# EAGLE board usb_tester-2.00 (EAGLE 6.3)
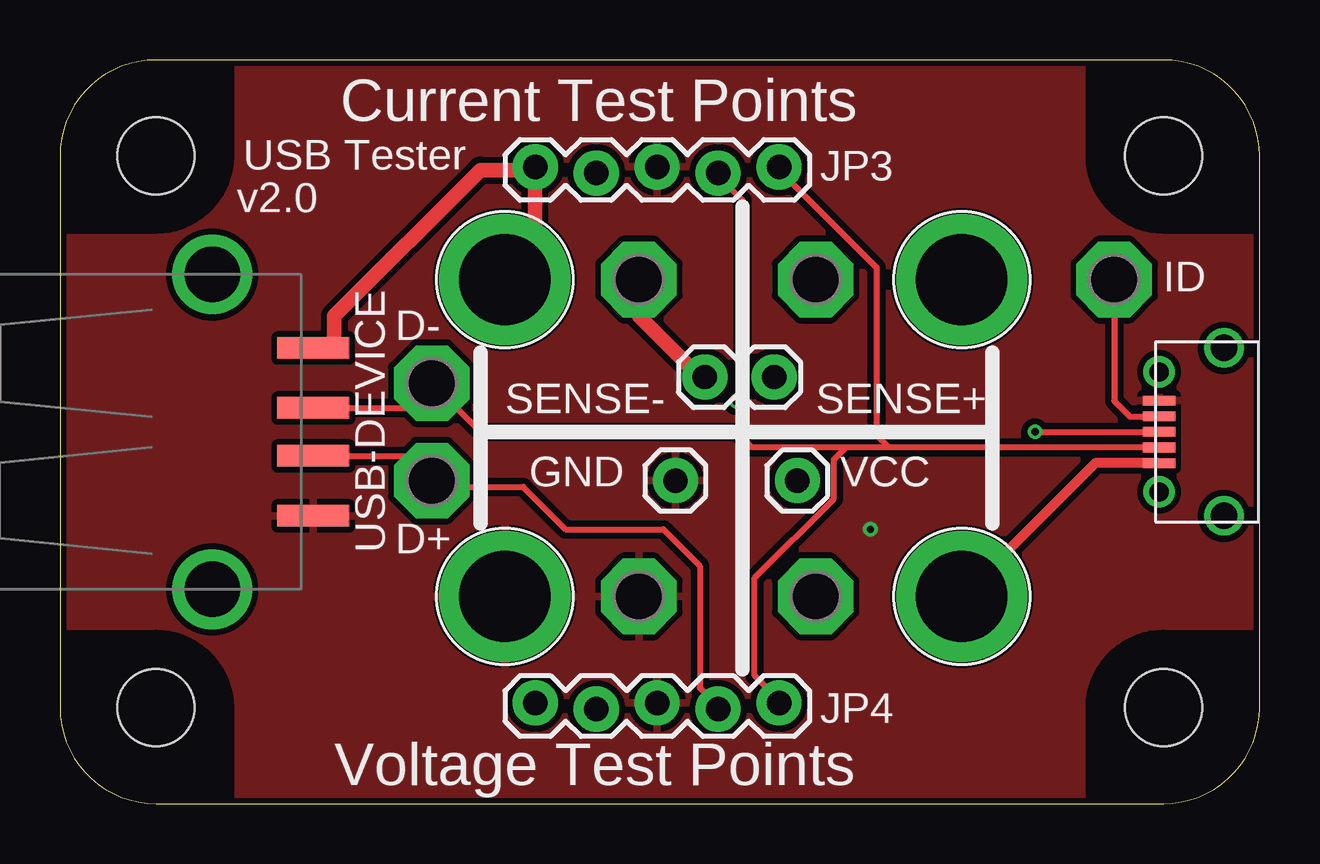
[diagram p0: board, top side]
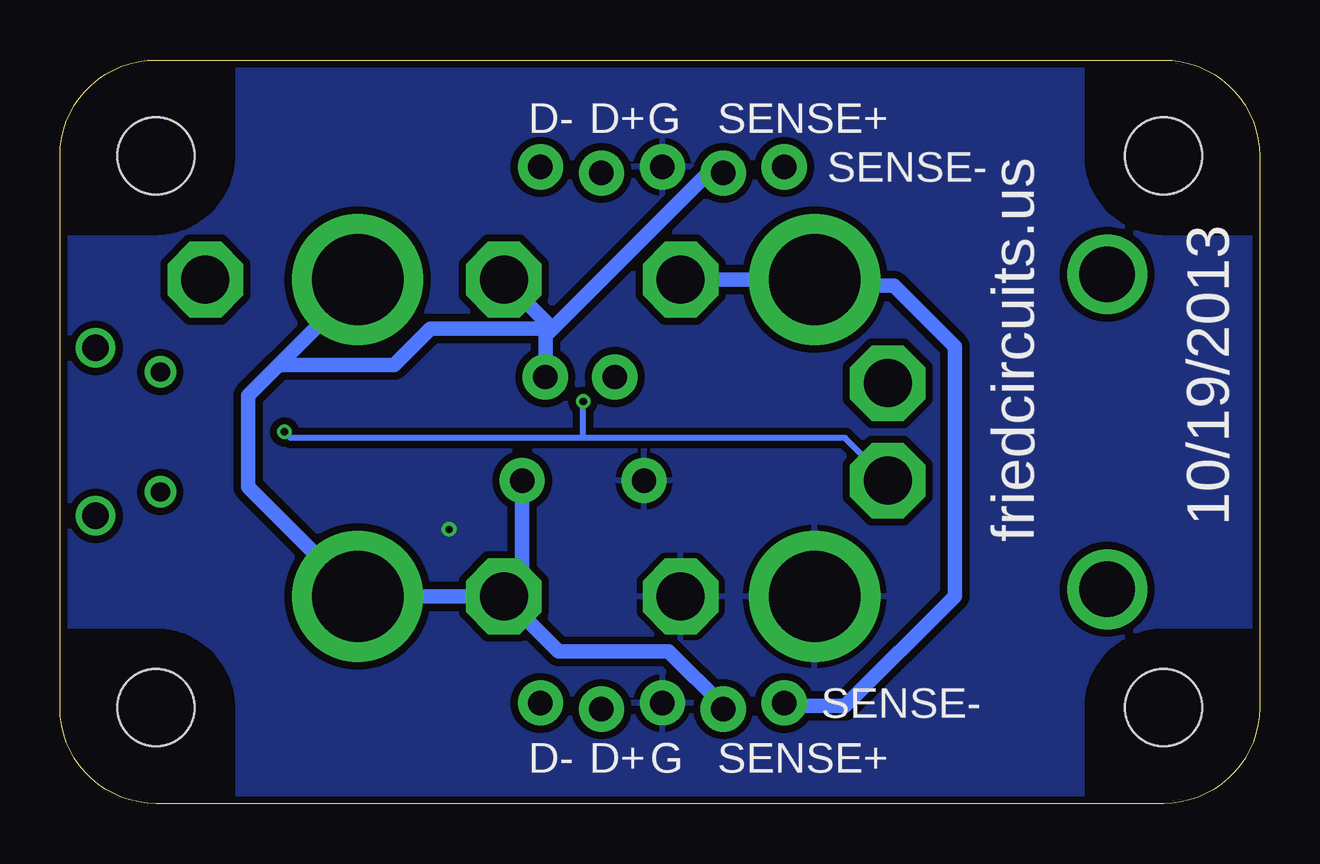
[diagram p1: board, bottom side, seen from below]

Size 50 x 31 mm. Coordinates in mm from the lower left corner, seen from the top.
Copper layers (1*16): Top 0.035mm / dielectric 1.5mm / Bottom 0.035mm
Design rules "Fusion_eagle_rule_v1.1": minimum track width 6mil, minimum drill 12mil, track to track 6mil, track to pad 6mil, pad to pad 6mil, via to via 6mil, smd to smd 0mil, copper to edge 10mil, drill to drill 10mil, minimum pad ring 10mil, minimum via ring 6mil, stop-mask expansion 2mil, vias tented up to drill 100mil, thermal gap 10mil
Net classes: 0 default: width 0.254 mm, drill 0.254 mm; 1 VBUS: width 0.61 mm, drill 0.254 mm; 2 ID: width 0.254 mm, drill 0.254 mm

## Footprints (pad centres in the part's own frame; a part is rotated, then mirrored left to right if it is on the bottom)
P1-20 = drill 2.007 pad 3.15 octagon: TP 0,0
BANANA_CONN = drill 3.81 pad 5.461: P$1 0,0
1X02_LOCK = drill 1.016 pad 1.88: 1 -0.178,0; 2 2.718,0
1X05_LOCK = drill 1.016 pad 1.88: 1 0,0.127; 2 2.54,-0.127; 3 5.08,0.127; 4 7.62,-0.127; 5 10.16,0.127
1X01 = drill 1.016 pad 1.88: 1 0,0
DP5031_V1 = hole 3.2: 4,4; 46,4; 46,27; 4,27
10118194-0001LF = smd 0.4 x 1.35: P1 -1.3,2.7; P2 -0.65,2.7; P3 0,2.7; P4 0.65,2.7; P5 1.3,2.7 | drill 1.1: P$1 -3.5,0; P$2 3.5,0 | drill 0.8: P$3 -2.5,2.7; P$4 2.5,2.7
USB-A-S-NOSILK-FEMALE = smd 3 x 0.9: D+ 4.212,-1; D- 4.212,1; GND 4.212,-3.5; VBUS 4.212,3.5 | drill 2.311: P$5 0,-6.566; P$6 0,6.566

## Placement (x,y rotation side)
D+  PTR1PAD1-20  [P1-20]  15.49,13.46 0 top
D-  PTR1PAD1-20  [P1-20]  15.49,17.53 0 top
ID  PTR1PAD1-20  [P1-20]  43.94,21.84 0 top
ID1  PTR1PAD1-20  [P1-20]  31.5,21.84 0 top
ID2  PTR1PAD1-20  [P1-20]  24.13,21.84 0 top
ID3  PTR1PAD1-20  [P1-20]  24.13,8.64 0 top
ID4  PTR1PAD1-20  [P1-20]  31.5,8.64 0 top
J1  [BANANA_CONN]  37.59,8.64 0 top
J2  [BANANA_CONN]  18.54,8.64 0 top
J3  [BANANA_CONN]  18.54,21.84 0 top
J4  [BANANA_CONN]  37.59,21.84 0 top
JP1  [1X02_LOCK]  27.05,17.78 0 top
JP3  [1X05_LOCK]  19.81,26.42 0 top
JP4  [1X05_LOCK]  19.81,4.06 0 top
JP6  M01PTH  [1X01]  25.65,13.46 0 top
JP7  M01PTH  [1X01]  30.73,13.46 0 top
PCB1  PCB_DP_RECTANGLE-31X50  [DP5031_V1]  0,0 0 top
U$1  FRAME_DINA4_L  [FC_CREDIT]  -2.54,-5.08 0 top  (outside the outline)
U$2  10118194-0001LF  [10118194-0001LF]  48.51,15.49 90 top
USB-DEVICE  USB-A-SMD  [USB-A-S-NOSILK-FEMALE]  6.35,15.49 0 top

## Library data of the parts
D+ D- ID ID1-ID4 = testpad
J1-J4 JP3 JP4 JP6 JP7 = SparkFun-Connectors
JP1 = SparkFun-Passives
PCB1 = dp_devices; PCB_SIZE: DP5031_V1
U$1 = FriedCircuits; AUTHOR: William Garrido; FF1: fulfillment by; FF2: FriedCircuits; FF3: friedcircuits.us; PROJECT: USB Tester v2.0; URL2: www.friedcircuits.us
U$2 = FriedCircuits
USB-DEVICE = SparkFun-Connectors; PROD_ID: CONN-09520

## Nets
D+: D+.TP JP3.4 JP4.4 U$2.P3 USB-DEVICE.D+
D-: D-.TP JP3.5 JP4.5 U$2.P2 USB-DEVICE.D-
GND: ID3.TP J2.P$1 JP3.3 JP4.3 JP6.1 U$2.P5 USB-DEVICE.GND
ID [ID]: ID.TP U$2.P4
VBUSA [VBUS]: ID2.TP J3.P$1 JP1.1 JP3.1 JP4.1 USB-DEVICE.VBUS
VBUSB [VBUS]: ID1.TP ID4.TP J1.P$1 J4.P$1 JP1.2 JP3.2 JP4.2 JP7.1 U$2.P1

## Tracks (layer width: path | path; a pad name or v marks a point on that pad's centre or on a via)
D+  (via drill 0.3)
  Top 0.254: USB-DEVICE.D+ 14.46,14.49 D+.TP 15.49,13.21 19.3,13.21 21.08,11.43 25.15,11.43 26.67,9.91 26.67,4.83 27.43,4.06 JP4.4 | v40.64,15.49 U$2.P3 | v28.19,16.76 28.45,17.02 28.45,25.15 27.43,26.16 JP3.4
  Bottom 0.254: v40.64,15.49 40.39,15.24 28.19,15.24 | 28.19,15.24 17.27,15.24 D+.TP | 27.43,4.06 JP4.4 | 28.19,15.24 v28.19,16.76
D-
  Top 0.254: USB-DEVICE.D- 14.46,16.49 D-.TP 17.53,15.49 28.19,15.49 28.84,14.84 32.77,14.84 | U$2.P2 34.54,14.84 | 34.54,14.84 32.77,14.84 | JP4.5 29.97,4.32 28.96,5.33 28.96,9.4 32.26,12.7 32.26,14.34 32.77,14.84 | JP3.5 29.97,26.42 34.04,22.35 34.04,15.35 34.54,14.84
GND  (via drill 0.3)
  other vias: 33.78,11.43
  pour Top (isolate 0.254): 0,0 0,31.75 50.8,31.75 50.8,0
  pour Bottom (isolate 0.305): 0,0 50.8,0 50.8,31.75 0,31.75
  pour Bottom (isolate 0.305): 40.13,9.4 40.13,9.14 40.64,9.14
ID
  Top 0.254: ID.TP 43.94,16.79 44.6,16.13 45.8,16.13 U$2.P4
VBUSA
  Top 0.61: 11.68,19.05 USB-DEVICE.VBUS 11.43,19.05 11.18,19.05 11.43,19.3 11.43,20.32 17.53,26.42 19.68,26.42 JP3.1 19.81,23.11 J3.P$1 | ID2.TP 24.13,20.32 26.67,17.78 JP1.1
  Bottom 0.61: ID2.TP J3.P$1 18.29,21.59 15.24,21.59 12.7,19.05 12.7,8.64 17.27,4.06 19.68,4.06 JP4.1
VBUSB
  Top 0.406: U$2.P1 43.15,14.19 J1.P$1
  Bottom 0.61: 22.35,26.16 JP3.2 22.48,26.42 22.86,26.42 29.46,19.81 | J1.P$1 ID4.TP | 40.89,18.29 42.16,17.02 42.16,13.21 J1.P$1 | 37.59,8.89 J1.P$1 | JP4.2 22.35,4.06 24.64,6.35 29.21,6.35 ID4.TP | 29.46,19.81 34.54,19.81 36.07,18.29 40.89,18.29 | J4.P$1 37.59,21.59 40.89,18.29 | 29.46,19.81 ID1.TP | JP1.2 29.77,19.51 29.46,19.81 | JP7.1 30.73,9.4 ID4.TP

## Text on the board
tPlace: Current Test Points | USB Tester | v2.0 | SENSE- | SENSE+ | GND | VCC | Voltage Test Points
bPlace: G | SENSE+ | D+ | D- | friedcircuits.us | SENSE- | 10/19/2013 | SENSE- | SENSE+ | G | D+ | D-